# Allegro board lcdpower.brd
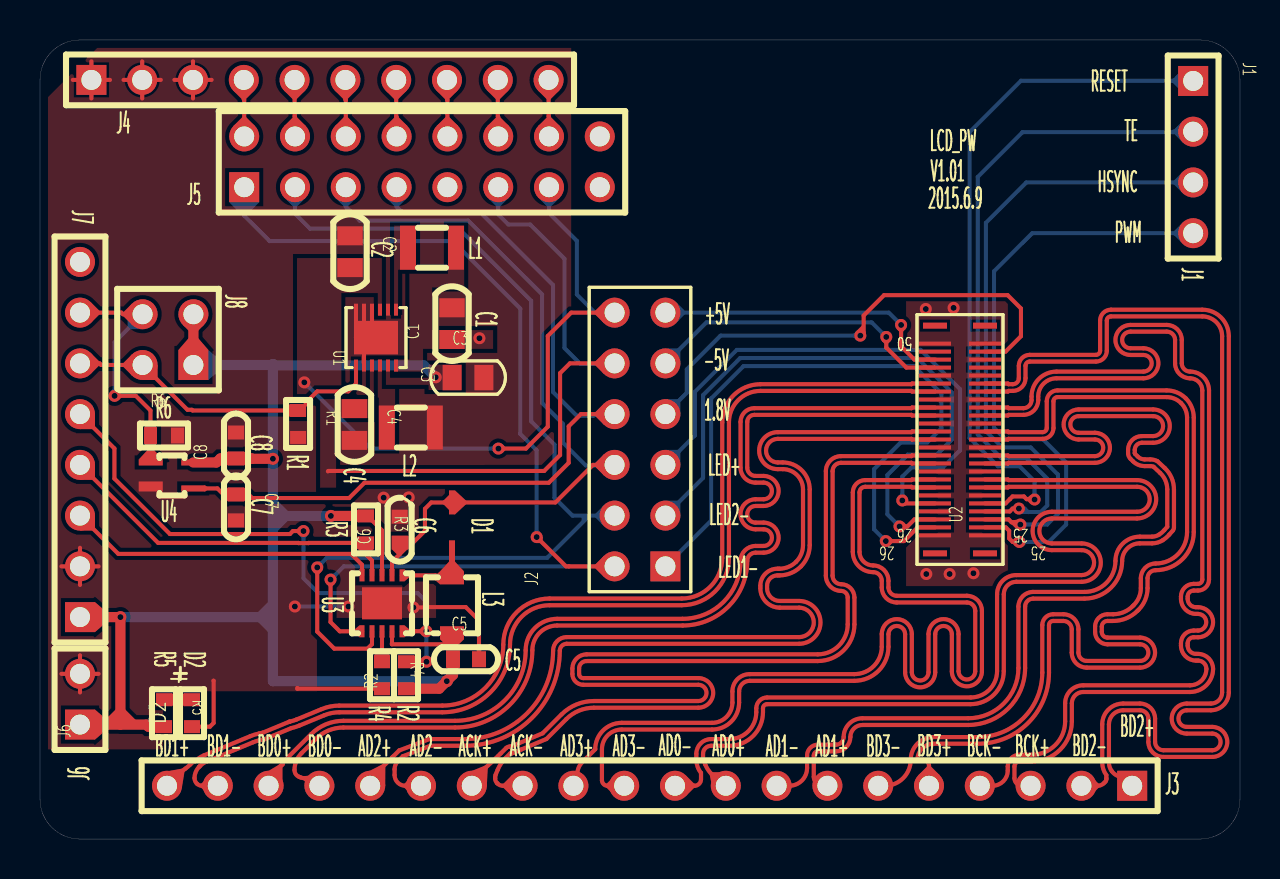
[diagram p0: board, top side]
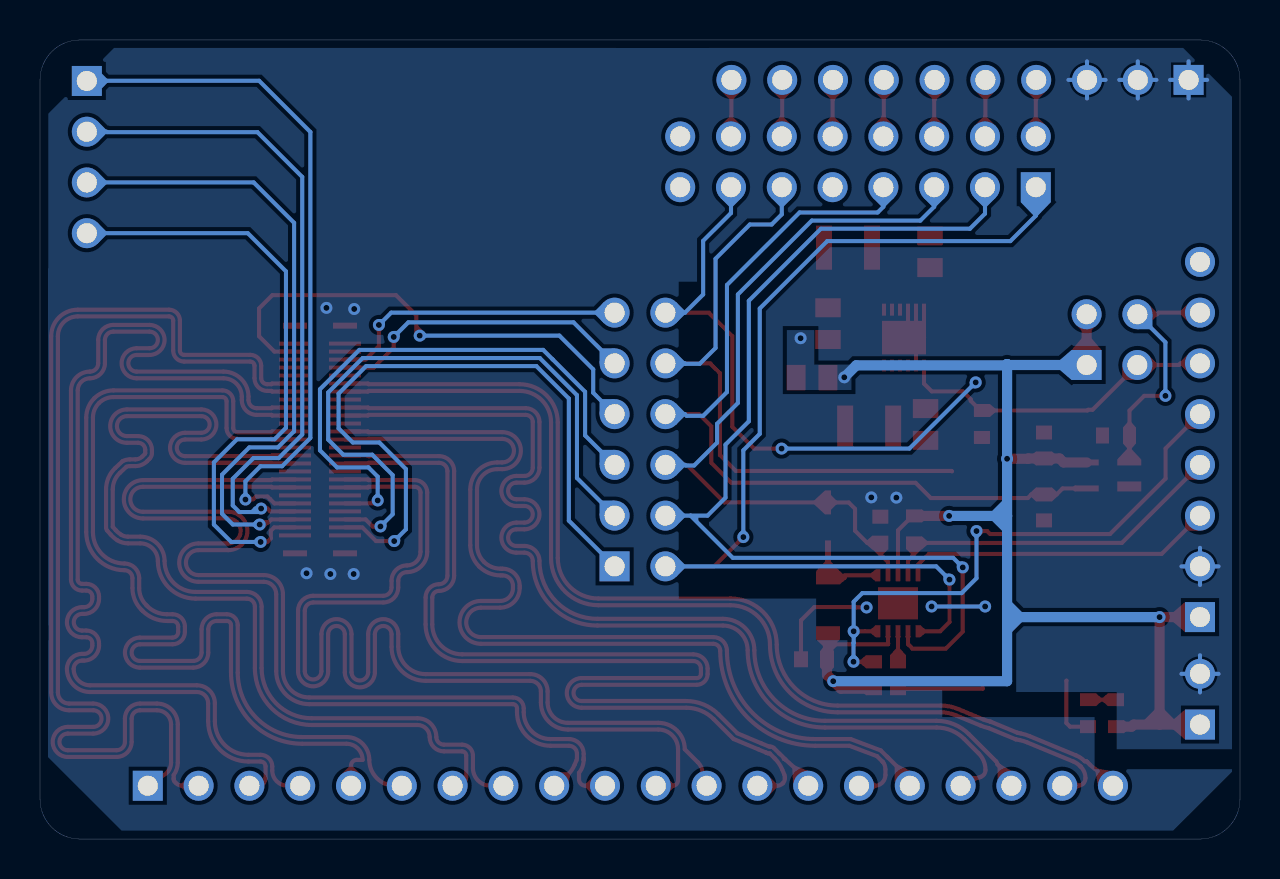
[diagram p1: board, bottom side, seen from below]

Outline 60 x 40 mm; copper layers: TOP, BOTTOM. Coordinates in mm from the lower left corner of the outline.
Outline path: 0,38 0,2 arc(0.59,0.59) 2,0 58,0 arc(59.41,0.59) 60,2 60,38 arc(59.41,39.41) 58,40 2,40 arc(0.59,39.41) 0,38

## Design rules (mm)
net group MG_ALL: nets CLK_NA CLK_NB CLK_PA CLK_PB DATA0_NA DATA0_NB DATA0_PA DATA0_PB DATA1_NA DATA1_NB DATA1_PA DATA1_PB DATA2_NA DATA2_NB DATA2_PA DATA2_PB DATA3_NA DATA3_NB DATA3_PA DATA3_PB

## Placement (name value [footprint] x y rotation side)
C1  10uF/CAPC0805  [CAPC0805]  20.6 25.8 90 top
C2  10uF/CAPC0805  [CAPC0805]  15.5 29.4 270 top
C3  100nF/CAPC0603  [CAPC0805]  21.4 23.1 0 top
C4  10uF/CAPC0805  [CAPC0805]  15.72 20.75 270 top
C5  1uF/CAPC0603  [CAPC0603]  21.3 9 0 top
C6  1uF/CAPC0603  [CAPC0603]  17.98 15.49 90 top
C7  1uF/CAPC0603  [CAPC0603]  9.8 16.6 270 top
C8  1uF/CAPC0603  [CAPC0603]  9.8 19.7 90 top
D1  B0530WS/SOD323  [SOD323]  20.6 14.35 90 top
D2  RED/RESC0603  [LEDM0603]  7.6 6.3 90 top
J1  HEADER 4  [HD254P-4X1]  57.66 37.95 270 top
J2  HEADER 6X2  [HD254P-6X2]  31.27 13.65 90 top
J3  HEADER 20  [HD254P-20X1]  54.61 2.67 180 top
J4  HEADER 10  [HD254P-10X1]  2.57 38 0 top
J5  HEADER 8X2  [HD254P-8X2]  10.21 32.63 0 top
J6  HEADER 2  [HD254P-2X1]  2 5.73 90 top
J7  HEADER 8  [HD254P-8X1]  2 11.11 90 top
J8  HEADER 2X2  [HD254P-2X2]  7.67 23.73 90 top
L1  4R7uH  [INDC2520]  20.8 29.6 180 top
L2  4R7uH  [INDC2520]  17.34 20.6 0 top
L3  10uH  [INDC260X280X120]  20.6 10.32 90 top
R1  100K/RESC0603  [RESC0603]  12.9 20.78 270 top
R2  10K/RESC0603  [RESC0603]  18.3 8.2 90 top
R3  10K/RESC0603  [RESC0603]  16.3 15.5 270 top
R4  8K/RESC0603  [RESC0603]  17.1 8.2 270 top
R5  510R/RESC0603  [RESC0603]  6.2 6.3 270 top
R6  100K/RESC0603  [RESC0603]  6.2 20.2 0 top
U1  TPS65133  [WSON40P300X300X80-12]  15.8 23.7 0 top
U2  BTL601425-W733L  [AXE650124]  47.25 24.8 180 top
U3  LM3509  [WSON50P300X300X80-10]  18.1 13.2 180 top
U4  RT9013-1HPY/1HGY  [SC-82]  5.54 18.85 270 top

## Library data of the parts
C1-C8 = CAP NP
D1 = BZX84C39/SOT
D2 = LED
J1 = HEADER 4
J2 = HEADER 6X2
J3 = HEADER 20
J4 = HEADER 10
J5 = HEADER 8X2
J6 = HEADER 2
J7 = HEADER 8
J8 = HEADER 2X2
L1-L3 = INDUCTOR
R1-R6 = R2
U1 = TPS65133
U2 = BTL601425-W733L
U3 = LM3509
U4 = RT9013-SC82

## Footprints (pads in the part's own frame, mm; a bottom-side part is the same pattern mirrored in y, then rotated)
AXE650124
  rect 1.2x0.3 smd: (0,10.5) (0,-0.9) (2.5,10.5) (2.5,-0.9)
  rect 1.6x0.2 smd: 1(0,0) 2(0,0.4) 3(0,0.8) 4(0,1.2) 5(0,1.6) 6(0,2) 7(0,2.4) 8(0,2.8) 9(0,3.2) 10(0,3.6) 11(0,4) 12(0,4.4) 13(0,4.8) 14(0,5.2) 15(0,5.6) 16(0,6) 17(0,6.4) 18(0,6.8) 19(0,7.2) 20(0,7.6) 21(0,8) 22(0,8.4) 23(0,8.8) 24(0,9.2) 25(0,9.6) 26(2.5,9.6) 27(2.5,9.2) 28(2.5,8.8) 29(2.5,8.4) 30(2.5,8) 31(2.5,7.6) 32(2.5,7.2) 33(2.5,6.8) 34(2.5,6.4) 35(2.5,6) 36(2.5,5.6) 37(2.5,5.2) 38(2.5,4.8) 39(2.5,4.4) 40(2.5,4) 41(2.5,3.6) 42(2.5,3.2) 43(2.5,2.8) 44(2.5,2.4) 45(2.5,2) 46(2.5,1.6) 47(2.5,1.2) 48(2.5,0.8) 49(2.5,0.4) 50(2.5,0)
CAPC0603
  rect 0.7x0.8 smd: 1(-0.65,0) 2(0.65,0)
CAPC0805
  rect 0.95x1.27 smd: 1(-0.795,0) 2(0.795,0)
HD254P-2X1
  rect 1.5x1.5 hole 1: 1(0,0)
  round 1.5 hole 1: 2(2.54,0)
HD254P-2X2
  rect 1.5x1.5 hole 1: 1(0,0)
  round 1.5 hole 1: 2(2.54,0) 3(0,2.54) 4(2.54,2.54)
HD254P-4X1
  rect 1.5x1.5 hole 1: 1(0,0)
  round 1.5 hole 1: 2(2.54,0) 3(5.08,0) 4(7.62,0)
HD254P-6X2
  rect 1.5x1.5 hole 1: 1(0,0)
  round 1.5 hole 1: 2(0,2.54) 3(2.54,0) 4(2.54,2.54) 5(5.08,0) 6(5.08,2.54) 7(7.62,0) 8(7.62,2.54) 9(10.16,0) 10(10.16,2.54) 11(12.7,0) 12(12.7,2.54)
HD254P-8X1
  rect 1.5x1.5 hole 1: 1(0,0)
  round 1.5 hole 1: 2(2.54,0) 3(5.08,0) 4(7.62,0) 5(10.16,0) 6(12.7,0) 7(15.24,0) 8(17.78,0)
HD254P-8X2
  rect 1.5x1.5 hole 1: 1(0,0)
  round 1.5 hole 1: 2(0,2.54) 3(2.54,0) 4(2.54,2.54) 5(5.08,0) 6(5.08,2.54) 7(7.62,0) 8(7.62,2.54) 9(10.16,0) 10(10.16,2.54) 11(12.7,0) 12(12.7,2.54) 13(15.24,0) 14(15.24,2.54) 15(17.78,0) 16(17.78,2.54)
HD254P-10X1
  rect 1.5x1.5 hole 1: 1(0,0)
  round 1.5 hole 1: 2(2.54,0) 3(5.08,0) 4(7.62,0) 5(10.16,0) 6(12.7,0) 7(15.24,0) 8(17.78,0) 9(20.32,0) 10(22.86,0)
HD254P-20X1
  rect 1.5x1.5 hole 1: 1(0,0)
  round 1.5 hole 1: 2(2.54,0) 3(5.08,0) 4(7.62,0) 5(10.16,0) 6(12.7,0) 7(15.24,0) 8(17.78,0) 9(20.32,0) 10(22.86,0) 11(25.4,0) 12(27.94,0) 13(30.48,0) 14(33.02,0) 15(35.56,0) 16(38.1,0) 17(40.64,0) 18(43.18,0) 19(45.72,0) 20(48.26,0)
INDC260X280X120
  rect 0.65x1.2 smd: 1(0,0) 2(2.75,0)
INDC2520
  rect 0.8x2.2 smd: 1(0,0) 2(2.4,0)
LEDM0603
  rect 0.65x0.8 smd: 1(-0.675,0) 2(0.675,0)
RESC0603
  rect 0.65x0.8 smd: 1(-0.675,0) 2(0.675,0)
SC-82
  rect 0.3x1.2 smd: 1(0,0) 3(1.3,2.125) 4(0,2.125)
  rect 0.5x1.2 smd: 2(1.2,0)
SOD323
  rect 1.2x0.3 smd: 1(0,0) 3(2.5,0)
WSON40P300X300X80-12
  rect 0.2x0.6 smd: 1(2,2.8) 2(1.6,2.8) 3(1.2,2.8) 4(0.8,2.8) 5(0.4,2.8) 6(0,2.8) 7(0,0) 8(0.4,0) 9(0.8,0) 10(1.2,0) 11(1.6,0) 12(2,0)
  rect 2.2x1.68 smd: 13(1,1.4)
WSON50P300X300X80-10
  rect 0.25x0.6 smd: 1(2,2.8) 2(1.5,2.8) 3(1,2.8) 4(0.5,2.8) 5(0,2.8) 6(0,0) 7(0.5,0) 8(1,0) 9(1.5,0) 10(2,0)
  rect 2x1.6 smd: 11(1,1.4)

## Nets
GND: C1.2 C2.1 C3.2 C4.2 C5.2 C6.2 C7.2 C8.2 D2.1(CATHODE) J4.1 J4.2 J4.3 J6.2 J7.2 L2.2 R1.2 R4.2 R6.2 U1.2(PGND) U1.4(GND1) U1.5(AGND) U1.6(GND2) U1.8(GND3) U1.13(ETP) U2.1(GND0) U2.3(GND1) U2.5(GND2) U2.8(GND3) U2.11(GND4) U2.14(GND5) U2.17(GND6) U2.20(GND7) U2.25(GND8) U2.26(GND9) U2.29(GND10) U2.31(GND11) U2.34(GND12) U2.37(GND13) U2.40(GND14) U2.43(GND15) U2.46(GND16) U2.50(GND17) U3.11(GND) U4.2(GND)
VCC_1V8_VCONT: C7.1 J2.8 J5.7 U4.3(VOUT)
VCC_3V3_IN: C1.1 C3.1 C5.1 C8.1 J6.1 J7.1 J8.1(3) J8.2(4) L1.1 L3.1 R2.1 R3.1 R5.2 U1.11(AVIN) U1.12(PVIN) U3.4(VIO) U3.8(IN) U4.4(VIN)
VCC_5V_VN: C4.1 J2.10 J5.11 U1.9(VNEG)
VCC_5V_VP: C2.2 J2.12 J5.13 U1.3(VPOS)
BOOST_RST: J7.5 R2.2 U3.5(R\E\S\E\T\/GPIO)
BOOST_SCL: J7.3 U3.10(SCL)
BOOST_SDA: J7.4 R3.2 U3.9(SDA)
CLK_NA: J3.13 U2.35(CLK_NA)
CLK_NB: J3.4 U2.10(CLK_NB)
CLK_PA: J3.14 U2.36(CLK_PA)
CLK_PB: J3.3 U2.9(CLK_PB)
DATA0_NA: J3.10 U2.19(DATA0_NA)
DATA0_NB: J3.17 U2.41(DATA0_NB)
DATA0_PA: J3.9 U2.18(DATA0_PA)
DATA0_PB: J3.18 U2.42(DATA0_PB)
DATA1_NA: J3.8 U2.16(DATA1_NA)
DATA1_NB: J3.19 U2.44(DATA1_NB)
DATA1_PA: J3.7 U2.15(DATA1_PA)
DATA1_PB: J3.20 U2.45(DATA1_PB)
DATA2_NA: J3.15 U2.38(DATA2_NA)
DATA2_NB: J3.2 U2.7(DATA2_NB)
DATA2_PA: J3.16 U2.39(DATA2_PA)
DATA2_PB: J3.1 U2.6(DATA2_PB)
DATA3_NA: J3.11 U2.32(DATA3_NA)
DATA3_NB: J3.6 U2.13(DATA3_NB)
DATA3_PA: J3.12 U2.33(DATA3_PA)
DATA3_PB: J3.5 U2.12(DATA3_PB)
INT_EN: J7.6 J8.3(1) R1.1 U1.7(EN)
LDO_EN: J7.7 J8.4(2) R6.1 U4.1(EN)
LED1-: J2.2 J5.1 U3.1(MAIN)
LED2-: J2.4 J5.3 U3.2(SUB/FB)
LED+: C6.1 D1.3(CATHODE) J2.6 J5.5 U3.7(OVP)
N16618: J4.10 J5.14
N16622: J4.9 J5.12
N16626: J4.8 J5.10
N16630: J4.7 J5.8
N16714: J4.6 J5.6
N16718: J4.5 J5.4
N16722: J4.4 J5.2
N16962: D2.2(ANODE) R5.1
N17570: J2.11 U2.48(VSP)
N17582: J2.9 U2.47(VSN)
N17594: J2.7 U2.2(IOVCC)
N17606: J2.5 U2.30(LED_A)
N17618: J2.3 U2.28(LED_C2)
N17630: J2.1 U2.27(LED_C1)
N17728: J1.4 U2.24(PWM)
N17740: J1.3 U2.23(HSYNC)
N17752: J1.2 U2.22(TE)
N17764: J1.1 U2.21(RESET)
N20530: L1.2 U1.1(SWP)
N21334: L2.1 U1.10(SWN)
N22129: D1.1(ANODE) L3.2 U3.6(SW)
N22733: R4.1 U3.3(SET)

Pads without a net: J5 9 15 16; J7 8; U2 4 49

## Via types
v1: diameter 0.6, hole 0.3, TOP to BOTTOM, 35 vias

## Routing (per net, layer and track width the routed paths; a pad name or vN(x,y) marks a point on that pad's centre or on a via; arc(x,y) is an arc through that point)
GND: length 59.5
  TOP w0.203: 1.07,8.27 J6.2 ; J6.2 2,9.2 ; J6.2 2.93,8.27 ; J6.2 2,7.34 ; 4.18,38 J4.2 ; J4.2 5.11,38.93 ; J4.2 5.11,37.07 ; J4.2 6.04,38 ; J4.3 7.65,38.93 ; J4.3 8.58,38 ; J4.3 7.65,37.07 ; J4.3 6.72,38 ; 16.2,25.1 U1.8 ; 16.2,25.1 16.6,25.1 ; 16.2,25.1 15.8,25.1 15.8,26.5 U1.6 ; 16.2,25.1 U1.5 ; 8.67,7.93 8.68,7.92 8.68,5.81 8.5,5.62 D2.1 ; C5.2 21.95,10.95 21.29,11.61 19.22,11.61 19.2,11.59 v1(18.67,11.59) ; 16.6,25.1 U1.13 ; 16.6,25.1 U1.4 ; J7.2 2.93,13.65 ; J7.2 2,14.58 ; J7.2 2,12.72 ; J7.2 1.07,13.65 ; 1.64,38 J4.1 ; J4.1 2.57,38.93 ; J4.1 2.57,37.07 ; J4.1 3.5,38 ; R4.2 12.87,7.53 12.87,7.57
  BOTTOM w0.203: 5.11,37.07 J4.2 ; J4.2 6.04,38 ; J4.2 5.11,38.93 ; J4.2 4.18,38 ; 6.72,38 J4.3 ; J4.3 7.65,38.93 ; J4.3 7.65,37.07 ; J4.3 8.58,38 ; J6.2 2,9.2 ; J6.2 2,7.34 ; J6.2 1.07,8.27 ; J6.2 2.93,8.27 ; 1.64,38 J4.1 ; J4.1 2.57,38.93 ; J4.1 3.5,38 ; J4.1 2.57,37.07 ; J7.2 2,14.58 ; J7.2 1.07,13.65 ; J7.2 2.93,13.65 ; J7.2 2,12.72 ; v1(15.42,11.64) v1(12.74,11.64)
  vias: v1(17.18,17.09) v1(18.44,17.1) v1(44.29,26.53) v1(44.32,13.27) v1(45.48,13.27) v1(45.68,26.59) v1(46.67,13.3)
VCC_1V8_VCONT: length 43.5
  TOP w0.203: U4.3 8.87,17.55 9.17,17.25 C7.1 10.43,17.25 10.61,17.07 15.46,17.07 16.22,17.83 25.44,17.83 26.43,18.83 26.43,20.66 27.05,21.27 J2.8
  BOTTOM w0.203: J2.8 27.75,21.27 27.66,21.18 26.84,21.18 25.65,22.37 25.65,27.73 22.02,31.36 18.12,31.36 17.83,31.65 J5.7
VCC_3V3_IN: length 79.3
  TOP w0.203: U3.8 17.1,15.45 16.37,16.17 R3.1 ; U3.4 17.6,9.79 17.59,9.79 17.59,9.75 20.6,9.75
  TOP w0.508: R2.1 19.96,7.53 20.33,7.9 ; 20.33,7.9 20.65,8.22 C5.1 20.6,9.05 L3.1 ; 20.33,7.9 v1(20.34,7.9) ; R3.1 v1(14.54,16.17) ; 4.02,5.73 5.31,5.73 5.42,5.62 R5.2 ; 4.02,5.73 v1(4.02,11.11) J7.1 ; 4.02,5.73 J6.1 ; J8.2 J8.1 ; v1(11.65,19.03) 10.6,19.03 10.58,19.05 C8.1 9.02,19.05 8.82,18.85 U4.4
  BOTTOM w0.508: v1(14.54,16.17) 11.65,16.17 ; 11.65,16.17 11.65,11.11 ; 11.65,16.17 v1(11.65,19.03) 11.65,23.78 ; 11.65,11.11 11.65,7.9 v1(20.34,7.9) ; 11.65,11.11 v1(4.02,11.11) ; 11.65,23.78 11.6,23.73 J8.1 ; 11.65,23.78 11.71,23.71 19.19,23.71 v1(19.79,23.11)
  vias: v1(21.97,25.07)
VCC_5V_VN: length 31.9
  TOP w0.203: 14.4,18.4 14.42,18.43 25.21,18.43 26,19.22 26,23.32 26.49,23.81 J2.10
  BOTTOM w0.203: J5.11 22.91,31.27 23.42,30.76 24.51,30.76 26.22,29.05 26.22,24.58 27.02,23.79 27.73,23.79 27.75,23.81 J2.10
VCC_5V_VP: length 30.6
  TOP w0.203: v1(22.92,19.55) 24.3,19.55 25.39,20.64 25.39,25.18 26.56,26.35 J2.12
  BOTTOM w0.203: v1(22.92,19.55) 16.53,19.55 v1(13.22,22.86) ; J5.13 25.45,31.34 26.84,29.94 26.84,27.26 27.75,26.35 J2.12
BOOST_RST: length 28.8
  TOP w0.203: v1(19.32,10.4) 18.75,10.4 18.75,10.4 U3.5 ; v1(13.17,15.42) 12.65,15.42 12.5,15.27 6.5,15.27 3.72,18.04 3.72,19.55 J7.5 ; R2.2 v1(19.32,8.88)
  BOTTOM w0.203: v1(19.32,8.88) 19.32,9.82 19.32,9.83 v1(19.32,10.4) 19.32,11.88 18.88,12.31 13.92,12.31 13.17,13.05 v1(13.17,15.42)
BOOST_SCL: length 15.6
  TOP w0.203: U3.10 16.1,13.73 15.55,14.27 3.92,14.27 J7.3
BOOST_SDA: length 17.7
  TOP w0.203: U3.9 16.6,13.94 16.38,14.17 16.38,14.2 16.3,14.27 R3.2 13.44,14.82 13.43,14.81 12.92,14.81 12.91,14.82 5.91,14.82 J7.4
CLK_NA: length 50.6
  TOP w0.208: U2.35 43.6,18.8 43.57,18.83 40.05,18.83 arc(39.75,18.71) 39.63,18.41 39.63,13.18 arc(39.75,12.88) 40.06,12.76 arc(40.53,12.56) 40.72,12.09 40.72,10.74 arc(40.18,9.45) 38.89,8.91 27.33,8.91 arc(27.06,8.8) 26.95,8.53 26.95,8.27 arc(27.02,8.12) 27.16,8.06 32.92,8.06 arc(33.66,7.32) 32.92,6.57 27.69,6.57 arc(26.95,6.43) 26.31,6 25.32,5.01 24.08,4.49 23.7,4.33 arc(23.7,4.33) 23.69,4.33 23.6,4.29 23.51,4.29 23.27,4.04 arc(23.05,3.77) 22.89,3.47 22.78,3.22 arc(22.76,3.16) 22.76,3.1 22.76,3.03 arc(22.78,2.91) 22.85,2.8 22.87,2.78 arc(23,2.7) 23.15,2.67 J3.13
CLK_NB: length 51.3
  TOP w0.208: U2.10 48.4,21.2 48.43,21.23 49.17,21.23 arc(49.69,21.45) 49.91,21.97 49.91,22.15 arc(50.18,22.8) 50.83,23.06 55.17,23.06 arc(55.92,23.82) 55.17,24.57 54.52,24.57 arc(54.11,24.98) 54.52,25.4 56.34,25.4 arc(56.63,25.28) 56.75,24.98 56.75,23.82 arc(56.97,23.28) 57.51,23.06 arc(57.94,22.88) 58.12,22.45 58.12,12.99 arc(58.05,12.84) 57.9,12.77 57.68,12.77 arc(57.23,12.59) 57.05,12.14 57.05,12.02 arc(57.27,11.49) 57.8,11.27 57.9,11.27 arc(58.32,10.85) 57.9,10.44 57.68,10.44 arc(57.23,10.25) 57.05,9.8 57.05,9.68 arc(57.27,9.15) 57.8,8.93 57.9,8.93 arc(58.2,8.81) 58.32,8.52 arc(58.08,7.94) 57.5,7.7 52.16,7.7 arc(51.52,7.43) 51.26,6.79 51.26,5.89 arc(50.77,4.71) 49.58,4.22 48.97,4.22 arc(48.56,4.05) 48.39,3.63 48.39,3.43 arc(48.16,2.89) 47.62,2.67 J3.4
CLK_PA: length 50.4
  TOP w0.208: J3.14 21.63,2.75 arc(21.64,2.8) 21.64,2.84 arc(21.67,2.98) 21.75,3.1 22.75,4 22.81,4.01 22.78,4.03 arc(22.9,4.16) 23.03,4.28 23.31,4.56 arc(23.38,4.61) 23.46,4.62 23.49,4.62 arc(23.53,4.63) 23.57,4.64 23.95,4.8 25.13,5.29 26.08,6.24 arc(26.82,6.73) 27.69,6.91 32.92,6.91 arc(33.32,7.32) 32.92,7.72 27.16,7.72 arc(26.78,7.88) 26.62,8.27 26.62,8.53 arc(26.83,9.04) 27.33,9.25 38.89,9.25 arc(39.95,9.68) 40.39,10.74 40.39,12.09 arc(40.29,12.32) 40.06,12.42 arc(39.52,12.64) 39.29,13.18 39.29,18.41 arc(39.51,18.95) 40.05,19.17 43.57,19.17 43.6,19.2 U2.36
CLK_PB: length 51.4
  TOP w0.208: J3.3 49.1,2.67 arc(48.83,2.78) 48.72,3.05 48.72,3.63 arc(48.8,3.81) 48.97,3.88 49.58,3.88 arc(51,4.47) 51.59,5.89 51.59,6.79 arc(51.76,7.2) 52.16,7.36 57.5,7.36 arc(58.32,7.7) 58.65,8.52 arc(58.43,9.05) 57.9,9.27 57.8,9.27 arc(57.51,9.39) 57.38,9.68 57.38,9.8 arc(57.47,10.01) 57.68,10.1 57.9,10.1 arc(58.65,10.85) 57.9,11.6 57.8,11.6 arc(57.51,11.73) 57.38,12.02 57.38,12.14 arc(57.47,12.35) 57.68,12.44 57.9,12.44 arc(58.29,12.6) 58.45,12.99 58.45,22.45 arc(58.17,23.12) 57.51,23.4 arc(57.21,23.52) 57.09,23.82 57.09,24.98 arc(56.87,25.52) 56.34,25.74 54.52,25.74 arc(53.77,24.98) 54.52,24.23 55.17,24.23 arc(55.59,23.82) 55.17,23.4 50.83,23.4 arc(49.94,23.03) 49.58,22.15 49.58,21.97 arc(49.46,21.69) 49.17,21.57 48.43,21.57 48.4,21.6 U2.9
DATA0_NA: length 49.2
  TOP w0.208: U2.19 48.4,17.6 48.43,17.63 54.85,17.63 arc(55.47,17.01) 54.85,16.38 50.59,16.38 arc(49.63,15.42) 50.59,14.46 52.08,14.46 arc(52.7,13.84) 52.08,13.21 48.81,13.21 arc(48.13,12.93) 47.85,12.25 47.85,8.41 arc(47.47,7.47) 46.53,7.09 36.36,7.09 arc(35.97,6.93) 35.81,6.54 35.81,6.35 arc(35.42,5.4) 34.47,5 33.55,5 arc(33.03,4.79) 32.82,4.27 32.82,4.06 arc(32.82,4.02) 32.82,3.97 arc(32.82,3.97) 32.82,3.97 32.82,3.97 arc(32.88,3.62) 33.05,3.31 33.05,2.99 arc(32.96,2.76) 32.73,2.67 J3.10
DATA0_NB: length 50.9
  TOP w0.208: U2.41 43.6,21.2 43.57,21.23 35.72,21.23 arc(35.47,21.13) 35.36,20.88 35.36,18.59 arc(35.48,18.3) 35.78,18.18 36.18,18.18 arc(36.93,17.42) 36.18,16.67 35.78,16.67 arc(35.36,16.26) 35.78,15.84 36.18,15.84 arc(36.93,15.09) 36.18,14.34 35.78,14.34 arc(35.48,14.21) 35.36,13.92 arc(34.42,11.63) 32.13,10.69 25.86,10.69 arc(24.98,10.33) 24.62,9.45 arc(23.49,6.72) 20.75,5.58 15.17,5.58 arc(14.42,5.43) 13.79,5.01 13.07,4.29 arc(12.82,3.91) 12.73,3.45 arc(12.79,3.25) 12.95,3.12 13.02,3.09 arc(13.12,3.06) 13.22,3.05 13.59,3.05 arc(13.86,2.94) J3.17
DATA0_PA: length 49
  TOP w0.208: U2.18 48.4,18 48.43,17.97 54.85,17.97 arc(55.81,17.01) 54.85,16.05 50.59,16.05 arc(49.97,15.42) 50.59,14.8 52.08,14.8 arc(53.04,13.84) 52.08,12.88 48.81,12.88 arc(48.37,12.69) 48.19,12.25 48.19,8.41 arc(47.7,7.24) 46.53,6.75 36.36,6.75 arc(36.21,6.69) 36.15,6.54 36.15,6.35 arc(35.66,5.16) 34.47,4.67 33.55,4.67 arc(33.27,4.55) 33.15,4.27 33.15,4.06 arc(33.16,4) 33.18,3.94 33.27,3.72 arc(33.4,3.47) 33.59,3.24 34.07,2.76 arc(34.17,2.69) J3.9
DATA0_PB: length 51
  TOP w0.208: U2.42 43.6,21.6 43.57,21.57 35.72,21.57 arc(35.23,21.37) 35.03,20.88 35.03,18.59 arc(35.25,18.06) 35.78,17.84 36.18,17.84 arc(36.6,17.42) 36.18,17.01 35.78,17.01 arc(35.03,16.26) 35.78,15.5 36.18,15.5 arc(36.6,15.09) 36.18,14.67 35.78,14.67 arc(35.25,14.45) 35.03,13.92 arc(34.18,11.87) 32.13,11.02 25.86,11.02 arc(24.74,10.56) 24.28,9.45 arc(23.25,6.95) 20.75,5.92 15.17,5.92 arc(14.3,5.74) 13.55,5.25 12.19,3.89 arc(12.15,3.82) 12.13,3.75 12.11,3.72 arc(12.09,3.7) 12.07,3.68 arc(12.04,3.66) 12.02,3.64 11.7,3.33 J3.18
DATA1_NA: length 50.3
  TOP w0.208: U2.16 48.4,18.8 48.43,18.83 52.74,18.83 arc(53.5,19.58) 52.74,20.34 51.93,20.34 arc(51.52,20.75) 51.93,21.17 55.66,21.17 arc(56.15,20.67) 55.66,20.17 55.09,20.17 arc(54.61,19.97) 54.4,19.48 54.4,19.32 arc(54.43,19.17) 54.52,19.04 54.65,18.91 arc(54.92,18.73) 55.23,18.67 55.51,18.67 arc(55.6,18.66) 55.68,18.64 56,18.33 arc(56.27,17.95) 56.36,17.5 56.36,15.63 56.21,15.46 arc(56.09,15.34) 55.95,15.24 arc(55.79,15.16) 55.6,15.14 54.99,15.14 arc(54.13,14.78) 53.77,13.92 arc(53.32,12.82) 52.22,12.37 49.66,12.37 arc(49.14,12.15) 48.92,11.63 48.92,8.56 arc(48.18,6.78) 46.41,6.05 41.12,6.05 arc(40.46,5.77) 40.18,5.11 arc(40.07,4.84) 39.8,4.72 38.9,4.72 arc(38.51,4.57) 38.35,4.18 38.35,3.56 arc(38.09,2.93) 37.47,2.67 J3.8
DATA1_NB: length 51.5
  TOP w0.208: U2.44 43.6,22.4 43.57,22.43 36.03,22.43 arc(34.91,21.97) 34.45,20.85 34.45,14.07 arc(33.75,12.4) 32.08,11.7 25.48,11.7 arc(24.08,11.13) 23.5,9.73 arc(22.51,7.34) 20.12,6.34 14.96,6.34 arc(14.58,6.31) 14.21,6.2 12.96,5.67 arc(12.76,5.61) 12.57,5.55 11.22,4.99 11.02,4.96 arc(10.84,4.91) 10.65,4.84 8.33,3.88 arc(8.16,3.79) 8.01,3.67 arc(7.99,3.64) 7.96,3.62 7.96,3.62 arc(7.79,3.36) 7.73,3.05 arc(7.76,2.9) 7.84,2.78 arc(7.96,2.7) 8.11,2.67 J3.19
DATA1_PA: length 50.2
  TOP w0.208: J3.7 39.13,2.67 arc(38.82,2.8) 38.69,3.11 38.69,4.18 arc(38.75,4.33) 38.9,4.39 39.8,4.39 arc(40.31,4.6) 40.52,5.11 arc(40.7,5.53) 41.12,5.71 46.41,5.71 arc(48.42,6.54) 49.26,8.56 49.26,11.63 arc(49.37,11.92) 49.66,12.03 52.22,12.03 arc(53.56,12.59) 54.11,13.92 arc(54.37,14.54) 54.99,14.8 55.6,14.8 arc(55.88,14.84) 56.13,14.96 arc(56.31,15.09) 56.46,15.24 56.65,15.45 arc(56.68,15.51) 56.7,15.58 56.7,17.5 arc(56.58,18.09) 56.23,18.58 55.87,18.92 arc(55.69,18.98) 55.51,19 55.23,19 arc(55.04,19.04) 54.88,19.15 54.76,19.28 54.74,19.32 54.74,19.48 arc(54.84,19.73) 55.09,19.84 55.66,19.84 arc(56.49,20.67) 55.66,21.5 51.93,21.5 arc(51.18,20.75) 51.93,20 52.74,20 arc(53.16,19.58) 52.74,19.17 48.43,19.17 48.4,19.2 U2.15
DATA1_PB: length 51.6
  TOP w0.208: J3.20 6.58,3 arc(6.6,3.05) 6.61,3.1 6.62,3.1 arc(6.68,3.11) 6.73,3.14 7.28,3.53 arc(7.4,3.63) 7.51,3.73 7.62,3.84 arc(7.63,3.85) 7.64,3.86 7.67,3.89 7.76,3.89 7.77,3.9 arc(7.97,4.07) 8.2,4.19 10.53,5.15 arc(10.74,5.23) 10.96,5.28 11.1,5.31 arc(11.12,5.32) 11.14,5.32 12.45,5.87 arc(12.47,5.87) 12.49,5.88 12.5,5.88 arc(12.66,5.93) 12.83,5.98 14.09,6.51 arc(14.52,6.64) 14.96,6.68 20.12,6.68 arc(22.27,7.57) 23.16,9.73 arc(23.84,11.36) 25.48,12.04 32.08,12.04 arc(33.52,12.63) 34.11,14.07 34.11,20.85 arc(34.67,22.21) 36.03,22.77 43.57,22.77 43.6,22.8 U2.45
DATA2_NA: length 49.2
  TOP w0.208: U2.38 43.6,20 43.57,20.03 36.89,20.03 arc(36.3,19.44) 36.89,18.85 37.13,18.85 arc(38.09,18.46) 38.49,17.5 38.49,14.71 arc(38.37,14.13) 38.04,13.64 arc(37.55,13.31) 36.97,13.2 36.88,13.2 arc(36.51,13.04) 36.35,12.67 36.35,12.56 arc(36.54,12.11) 36.99,11.92 37.95,11.92 arc(39.02,10.85) 37.95,9.77 26.34,9.77 arc(26.09,9.67) 25.99,9.42 arc(24.6,6.06) 21.23,4.67 19.52,4.67 18.15,4.15 17.9,3.9 17.84,3.84 arc(17.76,3.68) 17.73,3.49 17.73,3.2 arc(17.89,2.82) 18.27,2.67 J3.15
DATA2_NB: length 52.5
  TOP w0.208: U2.7 48.4,22.4 48.43,22.43 48.64,22.43 arc(49.09,22.62) 49.28,23.07 49.28,23.69 arc(49.34,23.84) 49.48,23.9 52.8,23.9 arc(53.18,24.06) 53.34,24.44 53.34,25.95 arc(53.4,26.1) 53.55,26.16 58.12,26.16 arc(58.82,25.87) 59.11,25.17 59.11,7.34 arc(58.94,6.95) 58.55,6.78 57.34,6.78 arc(56.59,6.03) 57.34,5.28 58.61,5.28 arc(59.03,4.86) 58.61,4.45 56.17,4.45 arc(55.88,4.57) 55.75,4.86 55.75,6.03 arc(55.53,6.56) 55,6.78 54.15,6.78 arc(53.42,6.48) 53.11,5.74 53.11,3.83 arc(53.16,3.5) 53.32,3.2 arc(53.31,3.12) 53.32,3.05 53.32,2.98 arc(53.31,2.93) 53.27,2.88 53.19,2.79 arc(53.05,2.7) 52.88,2.67 J3.2
DATA2_PA: length 49
  TOP w0.208: U2.39 43.6,20.4 43.57,20.37 36.89,20.37 arc(35.97,19.44) 36.89,18.52 37.13,18.52 arc(37.85,18.22) 38.15,17.5 38.15,14.71 arc(38.06,14.26) 37.81,13.88 arc(37.42,13.62) 36.97,13.53 36.88,13.53 arc(36.27,13.28) 36.02,12.67 36.02,12.56 arc(36.3,11.87) 36.99,11.58 37.95,11.58 arc(38.69,10.85) 37.95,10.11 26.34,10.11 arc(25.85,9.91) 25.65,9.42 arc(24.36,6.3) 21.23,5 19.46,5 17.96,4.44 17.66,4.13 17.59,4.07 16.74,3.23 arc(16.57,2.97) J3.16
DATA2_PB: length 52.5
  TOP w0.208: U2.6 48.4,22.8 48.43,22.77 48.64,22.77 arc(48.85,22.86) 48.94,23.07 48.94,23.69 arc(49.1,24.08) 49.48,24.24 52.8,24.24 arc(52.94,24.3) 53,24.44 53,25.95 arc(53.16,26.34) 53.55,26.5 58.12,26.5 arc(59.05,26.11) 59.44,25.17 59.44,7.34 arc(59.18,6.71) 58.55,6.45 57.34,6.45 arc(56.92,6.03) 57.34,5.61 58.61,5.61 arc(59.36,4.86) 58.61,4.11 56.17,4.11 arc(55.64,4.33) 55.42,4.86 55.42,6.03 arc(55.3,6.32) 55,6.45 54.15,6.45 arc(53.65,6.24) 53.45,5.74 53.45,3.83 arc(53.48,3.6) 53.59,3.4 arc(53.85,3.18) 54.18,3.1 arc(54.48,2.97) J3.1
DATA3_NA: length 51.9
  TOP w0.208: U2.32 43.6,17.6 43.57,17.63 41.26,17.63 arc(41.06,17.55) 40.98,17.35 40.98,14.38 arc(41.17,13.9) 41.66,13.7 arc(42.2,13.47) 42.42,12.93 42.42,12.59 arc(42.55,12.3) 42.84,12.18 46.34,12.18 arc(46.88,11.96) 47.1,11.42 47.1,8.4 arc(46.34,7.65) 45.59,8.4 45.59,10.26 arc(45.18,10.67) 44.76,10.26 44.76,8.35 arc(44.01,7.59) 43.26,8.35 43.26,10.26 arc(42.84,10.67) 42.42,10.26 42.42,9.63 arc(41.92,8.42) 40.72,7.92 35.48,7.92 arc(35.11,7.76) 34.96,7.39 34.96,6.83 arc(34.56,5.88) 33.6,5.48 29.08,5.48 arc(28.39,5.19) 28.1,4.5 28.1,2.95 arc(28.18,2.75) 28.38,2.67 J3.11
DATA3_NB: length 50.7
  TOP w0.208: U2.13 48.4,20 48.43,20.03 50.13,20.03 arc(50.51,20.19) 50.67,20.58 50.67,21.92 arc(50.73,22.06) 50.88,22.12 56.33,22.12 arc(56.72,22.05) 57.05,21.82 arc(57.28,21.49) 57.35,21.1 57.35,15.37 arc(56.89,14.25) 55.78,13.79 arc(55.26,13.58) 55.04,13.06 55.04,12.56 arc(54.95,12.1) 54.69,11.71 54.64,11.66 arc(54.19,11.36) 53.65,11.25 53.37,11.25 arc(52.94,11.07) 52.75,10.63 52.75,10.37 arc(52.94,9.93) 53.37,9.75 55,9.75 arc(55.42,9.33) 55,8.92 52.34,8.92 arc(52.04,9.04) 51.92,9.33 51.92,10.5 arc(51.7,11.03) 51.17,11.25 50.66,11.25 arc(50.27,11.09) 50.11,10.71 50.11,8.33 arc(49.17,6.05) 46.89,5.11 44.68,5.11 arc(43.87,4.77) 43.54,3.96 arc(43.16,3.05) 42.24,2.67 J3.6
DATA3_PA: length 51.8
  TOP w0.208: U2.33 43.6,18 43.57,17.97 41.26,17.97 arc(40.82,17.79) 40.64,17.35 40.64,14.38 arc(40.94,13.66) 41.66,13.36 arc(41.96,13.23) 42.09,12.93 42.09,12.59 arc(42.31,12.06) 42.84,11.84 46.34,11.84 arc(46.64,11.72) 46.76,11.42 46.76,8.4 arc(46.34,7.98) 45.93,8.4 45.93,10.26 arc(45.18,11.01) 44.42,10.26 44.42,8.35 arc(44.01,7.93) 43.59,8.35 43.59,10.26 arc(42.84,11.01) 42.09,10.26 42.09,9.63 arc(41.69,8.66) 40.72,8.26 35.48,8.26 arc(34.87,8) 34.62,7.39 34.62,6.83 arc(34.32,6.11) 33.6,5.82 29.08,5.82 arc(28.15,5.43) 27.76,4.5 27.11,3.85 arc(26.93,3.57) 26.87,3.25 arc(26.86,3.15) 26.83,3.04 J3.12
DATA3_PB: length 50.6
  TOP w0.208: U2.12 48.4,20.4 48.43,20.37 50.13,20.37 arc(50.28,20.43) 50.34,20.58 50.34,21.92 arc(50.5,22.3) 50.88,22.46 56.33,22.46 arc(56.85,22.36) 57.29,22.06 arc(57.58,21.62) 57.69,21.1 57.69,15.37 arc(57.13,14.02) 55.78,13.46 arc(55.49,13.34) 55.38,13.06 55.38,12.56 arc(55.26,11.97) 54.93,11.48 54.87,11.42 arc(54.31,11.05) 53.65,10.92 53.37,10.92 arc(53.17,10.83) 53.09,10.63 53.09,10.37 arc(53.17,10.17) 53.37,10.08 55,10.08 arc(55.75,9.33) 55,8.58 52.34,8.58 arc(51.81,8.8) 51.59,9.33 51.59,10.5 arc(51.46,10.79) 51.17,10.92 50.66,10.92 arc(50.51,10.86) 50.45,10.71 50.45,8.33 arc(49.41,5.81) 46.89,4.77 44.68,4.77 arc(44.11,4.53) 43.87,3.96 44.16,3.96 arc(44.37,3.88) 44.45,3.67 J3.5
INT_EN: length 16.3
  TOP w0.203: U1.7 15.8,22.8 15.41,22.41 13.86,22.41 13.46,22.01 13.46,21.94 12.98,21.45 R1.1 7.63,21.45 7.59,21.49 7.37,21.49 J8.3 3.06,23.73 2.98,23.81 J7.6
LDO_EN: length 12.5
  TOP w0.203: J8.4 4.15,26.27 4.07,26.35 J7.7 ; v1(3.73,22.18) 4.79,22.18 5.52,21.45 R6.1 5.52,19.57 5.54,19.56 U4.1
  BOTTOM w0.203: J8.4 3.73,24.87 v1(3.73,22.18)
LED1-: length 51.8
  TOP w0.203: v1(24.83,15.12) 26.3,13.65 26.45,13.65 J2.2 ; v1(14.53,12.99) 14.53,10.86 14.99,10.4 U3.1
  BOTTOM w0.203: J5.1 10.21,31.2 11.48,29.93 20.64,29.93 24.01,26.56 24.01,20.28 24.83,19.46 v1(24.83,15.12) ; J2.2 15.19,13.65 v1(14.53,12.99)
LED2-: length 50.4
  TOP w0.203: U3.2 16.6,9.75 16.38,9.53 14.71,9.53 13.86,10.38 v1(13.86,13.6)
  BOTTOM w0.203: v1(13.86,13.6) 14.34,14.08 25.36,14.08 27.47,16.19 ; 27.47,16.19 J2.4 ; 27.47,16.19 26.62,16.19 25.73,17.09 25.73,19.74 24.56,20.91 24.56,26.94 20.95,30.55 13.5,30.55 12.75,31.3 J5.3
LED+: length 38.3
  TOP w0.203: J2.6 27.65,18.73 25.77,16.85 D1.3 20.22,16.85 20.22,16.85 19.57,16.85 19.25,16.53 19.25,15.43 18.65,14.84 C6.1 17.98,14.26 17.6,13.87 U3.7
  BOTTOM w0.203: J5.5 15.29,31.65 15.98,30.96 21.41,30.96 25.11,27.26 25.11,21.83 26.15,20.78 26.15,19.84 27.29,18.7 27.72,18.7 27.75,18.73 J2.6
N16618: length 2.8
  TOP w0.203: J5.14 25.45,36.15 25.43,36.17 J4.10
N16622: length 2.8
  TOP w0.203: J5.12 22.91,36.15 22.89,36.17 J4.9
N16626: length 2.8
  TOP w0.203: J5.10 20.37,37 20.35,37.02 J4.8
N16630: length 2.8
  TOP w0.203: J5.8 17.83,36.15 17.81,36.17 J4.7
N16714: length 2.8
  TOP w0.203: J4.6 15.27,37.02 15.29,37 J5.6
N16718: length 2.8
  TOP w0.203: J4.5 12.73,36.17 12.75,36.15 J5.4
N16722: length 2.8
  TOP w0.203: J4.4 10.19,37.02 10.21,37 J5.2
N16962: length 1.4
  TOP w0.203: D2.2 R5.1
N17570: length 15.1
  TOP w0.203: U2.48 43.72,24 43.06,24.67 v1(43.06,25.73)
  BOTTOM w0.203: J2.11 42.44,26.35 v1(43.06,25.73)
N17582: length 15.6
  TOP w0.203: v1(42.31,25.13) 42.31,24.6 43.32,23.6 U2.47
  BOTTOM w0.203: v1(42.31,25.13) 41.58,25.86 33.32,25.86 J2.9
N17594: length 25.2
  TOP w0.203: v1(41.02,25.2) 41.18,25.37 41.18,26.21 42.2,27.23 48.38,27.23 49.05,26.56 49.05,25.17 48.28,24.4 U2.2
  BOTTOM w0.203: J2.7 32.34,22.34 32.34,23.51 34.03,25.2 v1(41.02,25.2)
N17606: length 28.6
  TOP w0.203: v1(43.12,16.95) 43.26,16.8 U2.30
  BOTTOM w0.203: v1(43.12,16.95) 43.12,18.14 43.58,18.6 45.15,18.6 46,19.46 46,22.52 44.03,24.49 34.84,24.49 34.37,24.01 32.75,22.39 32.75,20.21 J2.5
N17618: length 31.8
  TOP w0.203: U2.28 43.72,16 43.37,15.65 v1(42.98,15.65)
  BOTTOM w0.203: v1(42.98,15.65) 42.37,16.26 42.37,18.22 43.39,19.24 44.84,19.24 45.59,19.99 45.59,22.35 43.86,24.08 35.01,24.08 33.15,22.22 33.15,18.07 J2.3
N17630: length 34.6
  TOP w0.203: U2.27 43.88,15.6 43.2,14.91 v1(42.29,14.91)
  BOTTOM w0.203: J2.1 33.56,15.94 33.56,22.05 35.18,23.67 43.7,23.67 45.07,22.3 45.07,20.56 44.36,19.85 43.03,19.85 41.7,18.52 41.7,15.5 v1(42.29,14.91)
N17728: length 31
  TOP w0.203: v1(48.97,14.87) 48.64,14.87 48.46,15.05 48.46,15.43 48.29,15.6 U2.24
  BOTTOM w0.203: v1(48.97,14.87) 50.44,14.87 51.31,15.74 51.31,18.85 50.15,20.01 48.27,20.01 47.7,20.58 47.7,28.42 49.61,30.33 J1.4
N17740: length 32.1
  TOP w0.203: v1(49.02,15.74) 49.01,15.74 48.9,15.86 48.58,15.86 48.43,16 U2.23
  BOTTOM w0.203: v1(49.02,15.74) 50.36,15.74 50.9,16.28 50.9,18.24 49.54,19.6 48.11,19.6 47.29,20.41 47.29,30.85 49.32,32.87 J1.3
N17752: length 33.7
  TOP w0.203: U2.22 48.49,16.4 48.63,16.54 v1(48.95,16.54)
  BOTTOM w0.203: J1.2 56.68,35.41 56.66,35.38 49.13,35.38 46.89,33.14 46.89,20.25 48.07,19.07 49.33,19.07 50.36,18.03 50.36,16.7 50.04,16.37 49.41,16.37 49.23,16.54 v1(48.95,16.54)
N17764: length 35.3
  TOP w0.203: U2.21 48.28,16.8 48.63,17.15 49.2,17.15 49.33,17.01 49.71,17.01 v1(49.73,17)
  BOTTOM w0.203: v1(49.73,17) 49.73,17.91 48.97,18.66 47.9,18.66 46.48,20.08 46.48,35.39 49.04,37.96 56.67,37.96 56.68,37.95 J1.1
N22129: length 3.9
  TOP w0.203: U3.6 19.77,13.2 19.77,13.08 L3.2 D1.1
N22733: length 1.5
  TOP w0.203: U3.3 R4.1

## Copper pours and planes (outline as drawn; the poured copper is in the pictures)
GND on TOP: 0.4,4.49 0.4,37.14 2.86,39.6 26.56,39.6 26.56,13.03 19.8,13.03 19.8,11.07 13.85,11.07 13.85,7.4 6.15,7.4 6.15,4.49 ; 5 cut-outs
GND on TOP: 43.3,12.66 43.3,15.74 44.51,15.74 44.51,24.2 43.3,24.2 43.3,26.93 48.39,26.93 48.39,24.42 47.32,24.42 47.32,16.36 48.39,16.36 48.39,12.66
GND on TOP: 15.09,18.72 15.09,20.43 16.34,20.43 16.34,19.19 18.14,19.19 18.14,21.7 21.72,21.7 21.72,23.74 23.38,23.74 23.38,26.12 19.96,26.12 19.96,27.07 21.92,27.07 21.92,31.06 17.5,31.06 17.5,26.42 17.3,26.42 17.3,29.69 12.83,29.69 12.83,31.53 24.83,31.53 24.83,21.36 23.7,21.36 23.7,20.14 22.24,20.14 22.24,18.72
GND on BOTTOM: 3.34,0.42 0.4,3.36 0.4,3.5 7.27,3.5 7.27,6.11 14.89,6.11 14.89,9.95 21.19,9.95 21.19,12.04 28.06,12.04 28.06,27.9 26.55,27.9 26.55,13.04 19.82,13.04 19.82,11.06 13.87,11.06 13.87,7.36 6.16,7.36 6.16,4.49 0.4,4.49 0.4,37.16 2.84,39.6 26.55,39.6 26.55,39.6 31.19,39.6 31.19,39.6 56.3,39.6 59.58,36.31 59.58,28.57 59.6,28.57 59.6,10.7 59.58,10.7 59.58,9.95 59.6,9.95 59.6,4.1 55.92,0.42 ; 10 cut-outs
VCC_3V3_IN on TOP (solid shape): 3.46,11.25 3.5,11.11 3.46,10.97 2.75,10.36 1.94,11.11 2.75,11.86
VCC_3V3_IN on TOP (solid shape): 3.46,5.87 3.5,5.73 3.46,5.59 2.75,4.98 1.94,5.73 2.75,6.48
VCC_3V3_IN on TOP (solid shape): 7.53,25.19 7.67,25.23 7.81,25.19 8.42,24.48 7.67,23.67 6.92,24.48
VCC_3V3_IN on BOTTOM (solid shape): 9.13,23.87 9.17,23.73 9.13,23.59 8.42,22.98 7.61,23.73 8.42,24.48
VCC_3V3_IN on TOP: 19.43,22.48 19.43,22.73 17.3,22.73 17.3,24 17.5,24 17.5,23.09 19.43,23.09 19.43,23.75 21.08,23.75 21.08,22.48
VCC_3V3_IN on TOP: 17.7,23.39 17.7,24 18.47,24 18.47,28.3 20.4,28.3 20.4,30.71 21.21,30.71 21.21,27.61 19.61,27.61 19.61,25.48 22.66,25.48 22.66,24.54 19.15,24.54 19.15,23.39
VCC_3V3_IN on BOTTOM: 22.66,25.48 22.66,22.48 19.43,22.48 19.43,23.75 21.29,23.75 21.29,25.48
VCC_5V_VN on TOP: 16.7,24 16.7,21.07 14.8,21.07 14.8,17.59 14.01,17.59 14.01,22.02 16.49,22.02 16.49,24
VCC_5V_VP on TOP: 12.85,22.27 12.85,29.08 17.09,29.08 17.09,26.21 16.89,26.21 16.89,27.33 15.07,27.33 15.07,22.27
LED1- on BOTTOM (solid shape): 10.96,31.88 10.28,31.17 10.21,31.14 10.14,31.17 9.46,31.88 10.21,32.66
N20530 on TOP: 17.7,26.44 17.7,30.71 18.8,30.71 18.8,28.5 17.91,28.5 17.91,26.44
N21334 on TOP: 17.09,24 17.09,22.53 17.75,22.53 17.75,19.51 16.94,19.51 16.94,22.1 16.89,22.1 16.89,24
VCC_1V8_VCONT on TOP (solid shape): 28.76,21.27 28.2,20.74 27.74,21.2 27.71,21.27 27.74,21.34 28.2,21.8
VCC_1V8_VCONT on BOTTOM (solid shape): 18.36,32.1 17.9,31.64 17.83,31.61 17.76,31.64 17.3,32.1 17.83,32.66
VCC_1V8_VCONT on BOTTOM (solid shape): 28.76,21.27 28.2,20.74 27.74,21.2 27.71,21.27 27.74,21.34 28.2,21.8
VCC_3V3_IN on TOP (solid shape): 21.2,10 20.7,9.51 20.6,9.49 20.5,9.51 20,10 20.6,10.39
VCC_3V3_IN on TOP (solid shape): 8.2,25.74 7.85,25.39 7.67,25.31 7.49,25.39 7.14,25.74 7.67,26.33
VCC_3V3_IN on TOP (solid shape): 3.84,6.54 4.02,6.62 4.2,6.54 4.84,5.91 4.27,5.67 3.77,5.67 3.21,5.91
VCC_3V3_IN on BOTTOM (solid shape): 11.71,11.36 11.71,10.86 11.47,10.3 10.83,10.93 10.76,11.11 10.83,11.29 11.47,11.92
VCC_3V3_IN on BOTTOM (solid shape): 12.46,16.35 12.53,16.17 12.46,16 11.83,15.36 11.58,15.92 11.58,16.43 11.83,16.99
VCC_5V_VN on TOP (solid shape): 28.76,23.81 28.2,23.28 27.74,23.74 27.71,23.81 27.74,23.88 28.2,24.34
VCC_5V_VN on BOTTOM (solid shape): 23.44,32.1 22.98,31.64 22.91,31.61 22.84,31.64 22.38,32.1 22.91,32.66
VCC_5V_VN on BOTTOM (solid shape): 28.76,23.81 28.2,23.28 27.74,23.74 27.71,23.81 27.74,23.88 28.2,24.34
VCC_5V_VP on TOP (solid shape): 28.76,26.35 28.2,25.82 27.74,26.28 27.71,26.35 27.74,26.42 28.2,26.88
VCC_5V_VP on BOTTOM (solid shape): 25.98,32.1 25.52,31.64 25.45,31.61 25.38,31.64 24.92,32.1 25.45,32.66
VCC_5V_VP on BOTTOM (solid shape): 28.76,26.35 28.2,25.82 27.74,26.28 27.71,26.35 27.74,26.42 28.2,26.88
CLK_NA on TOP (solid shape): 24.16,2.67 23.6,2.14 23.14,2.59 23.11,2.67 23.14,2.74 23.6,3.2
DATA0_NA on TOP (solid shape): 32.74,2.74 32.77,2.67 32.74,2.59 32.28,2.14 31.72,2.67 32.28,3.2
DATA3_PB on TOP (solid shape): 44.38,3.65 44.45,3.68 44.52,3.65 44.98,3.2 44.45,2.64 43.92,3.2
INT_EN on TOP (solid shape): 2.99,23.88 3.02,23.81 2.99,23.74 2.53,23.28 1.97,23.81 2.53,24.34
INT_EN on TOP (solid shape): 5.16,23.73 4.6,23.2 4.14,23.66 4.11,23.73 4.14,23.8 4.6,24.26
LDO_EN on TOP (solid shape): 2.99,26.42 3.02,26.35 2.99,26.28 2.53,25.82 1.97,26.35 2.53,26.88
LDO_EN on TOP (solid shape): 5.16,26.27 4.6,25.74 4.14,26.2 4.11,26.27 4.14,26.34 4.6,26.8
LED1- on TOP (solid shape): 28.76,13.65 28.2,13.12 27.74,13.58 27.71,13.65 27.74,13.72 28.2,14.18
LED1- on BOTTOM (solid shape): 28.76,13.65 28.2,13.12 27.74,13.58 27.71,13.65 27.74,13.72 28.2,14.18
LED2- on BOTTOM (solid shape): 13.28,32.1 12.82,31.64 12.75,31.61 12.68,31.64 12.22,32.1 12.75,32.66
LED2- on BOTTOM (solid shape): 28.76,16.19 28.2,15.66 27.74,16.12 27.71,16.19 27.74,16.26 28.2,16.72
LED+ on TOP (solid shape): 28.76,18.73 28.2,18.2 27.74,18.66 27.71,18.73 27.74,18.8 28.2,19.26
LED+ on BOTTOM (solid shape): 15.82,32.1 15.36,31.64 15.29,31.61 15.22,31.64 14.76,32.1 15.29,32.66
LED+ on BOTTOM (solid shape): 28.76,18.73 28.2,18.2 27.74,18.66 27.71,18.73 27.74,18.8 28.2,19.26
N16618 on TOP (solid shape): 25.38,36.16 25.45,36.19 25.52,36.16 25.98,35.7 25.45,35.14 24.92,35.7
N16618 on TOP (solid shape): 25.96,37.47 25.5,37.01 25.43,36.98 25.36,37.01 24.9,37.47 25.43,38.03
N16622 on TOP (solid shape): 22.84,36.16 22.91,36.19 22.98,36.16 23.44,35.7 22.91,35.14 22.38,35.7
N16622 on TOP (solid shape): 23.42,37.47 22.96,37.01 22.89,36.98 22.82,37.01 22.36,37.47 22.89,38.03
N16626 on TOP (solid shape): 20.3,36.16 20.37,36.19 20.44,36.16 20.9,35.7 20.37,35.14 19.84,35.7
N16626 on TOP (solid shape): 20.88,37.47 20.42,37.01 20.35,36.98 20.28,37.01 19.82,37.47 20.35,38.03
N16630 on TOP (solid shape): 17.76,36.16 17.83,36.19 17.9,36.16 18.36,35.7 17.83,35.14 17.3,35.7
N16630 on TOP (solid shape): 18.34,37.47 17.88,37.01 17.81,36.98 17.74,37.01 17.28,37.47 17.81,38.03
N16714 on TOP (solid shape): 15.22,36.16 15.29,36.19 15.36,36.16 15.82,35.7 15.29,35.14 14.76,35.7
N16714 on TOP (solid shape): 15.8,37.47 15.34,37.01 15.27,36.98 15.2,37.01 14.74,37.47 15.27,38.03
N16718 on TOP (solid shape): 12.68,36.16 12.75,36.19 12.82,36.16 13.28,35.7 12.75,35.14 12.22,35.7
N16718 on TOP (solid shape): 13.26,37.47 12.8,37.01 12.73,36.98 12.66,37.01 12.2,37.47 12.73,38.03
N16722 on TOP (solid shape): 10.14,36.16 10.21,36.19 10.28,36.16 10.74,35.7 10.21,35.14 9.68,35.7
N16722 on TOP (solid shape): 10.72,37.47 10.26,37.01 10.19,36.98 10.12,37.01 9.66,37.47 10.19,38.03
N17570 on BOTTOM (solid shape): 32.26,26.42 32.29,26.35 32.26,26.28 31.8,25.82 31.24,26.35 31.8,26.88
N17728 on BOTTOM (solid shape): 57.68,30.33 57.13,29.8 56.67,30.26 56.64,30.33 56.67,30.4 57.13,30.86
N17740 on BOTTOM (solid shape): 57.68,32.87 57.13,32.34 56.67,32.8 56.64,32.87 56.67,32.94 57.13,33.4
N17752 on BOTTOM (solid shape): 57.68,35.41 57.13,34.88 56.67,35.34 56.64,35.41 56.67,35.48 57.13,35.94
N22129 on TOP (solid shape): 20.54,13.98 20.6,14 20.66,13.98 21.2,13.4 20.6,13.05 20,13.4

Small or netless copper shapes (teardrops, artwork), in the pictures only: 71 on TOP, 32 on BOTTOM

## Text on the board
Ref Des/Silkscreen Top: BD1+ | BD1- | BD0+ | BD0- | AD2+ | AD2- | ACK+ | ACK- | AD3+ | AD3- | AD0- | -5V | 1.8V | +5V | LED+ | LED2- | AD0+ | LED1- | AD1- | AD1+ | BD3- | BD3+ | 2015.6.9 | LCD_PW | V1.01 | BCK- | BCK+ | BD2- | RESET | HSYNC | PWM | BD2+ | TE
DEVICE_TYPE_TOP: FIGURE | SIZE | 11.811 | 39.37 | DRILL CHART: TOP to BOTTOM | ALL UNITS ARE IN MILS | PLATED | QTY | 35 | 76
